# Altium PCB ACS.PcbDoc
Units mil, origin at the board's own origin, x right, y up, seen from the top; angles counter-clockwise.
Board outline 3550 x 3775 mil, 2 copper layers (Top, Bottom), stack 61.811 mil thick; 77 components, 60 nets, 415 pads, 71 vias.
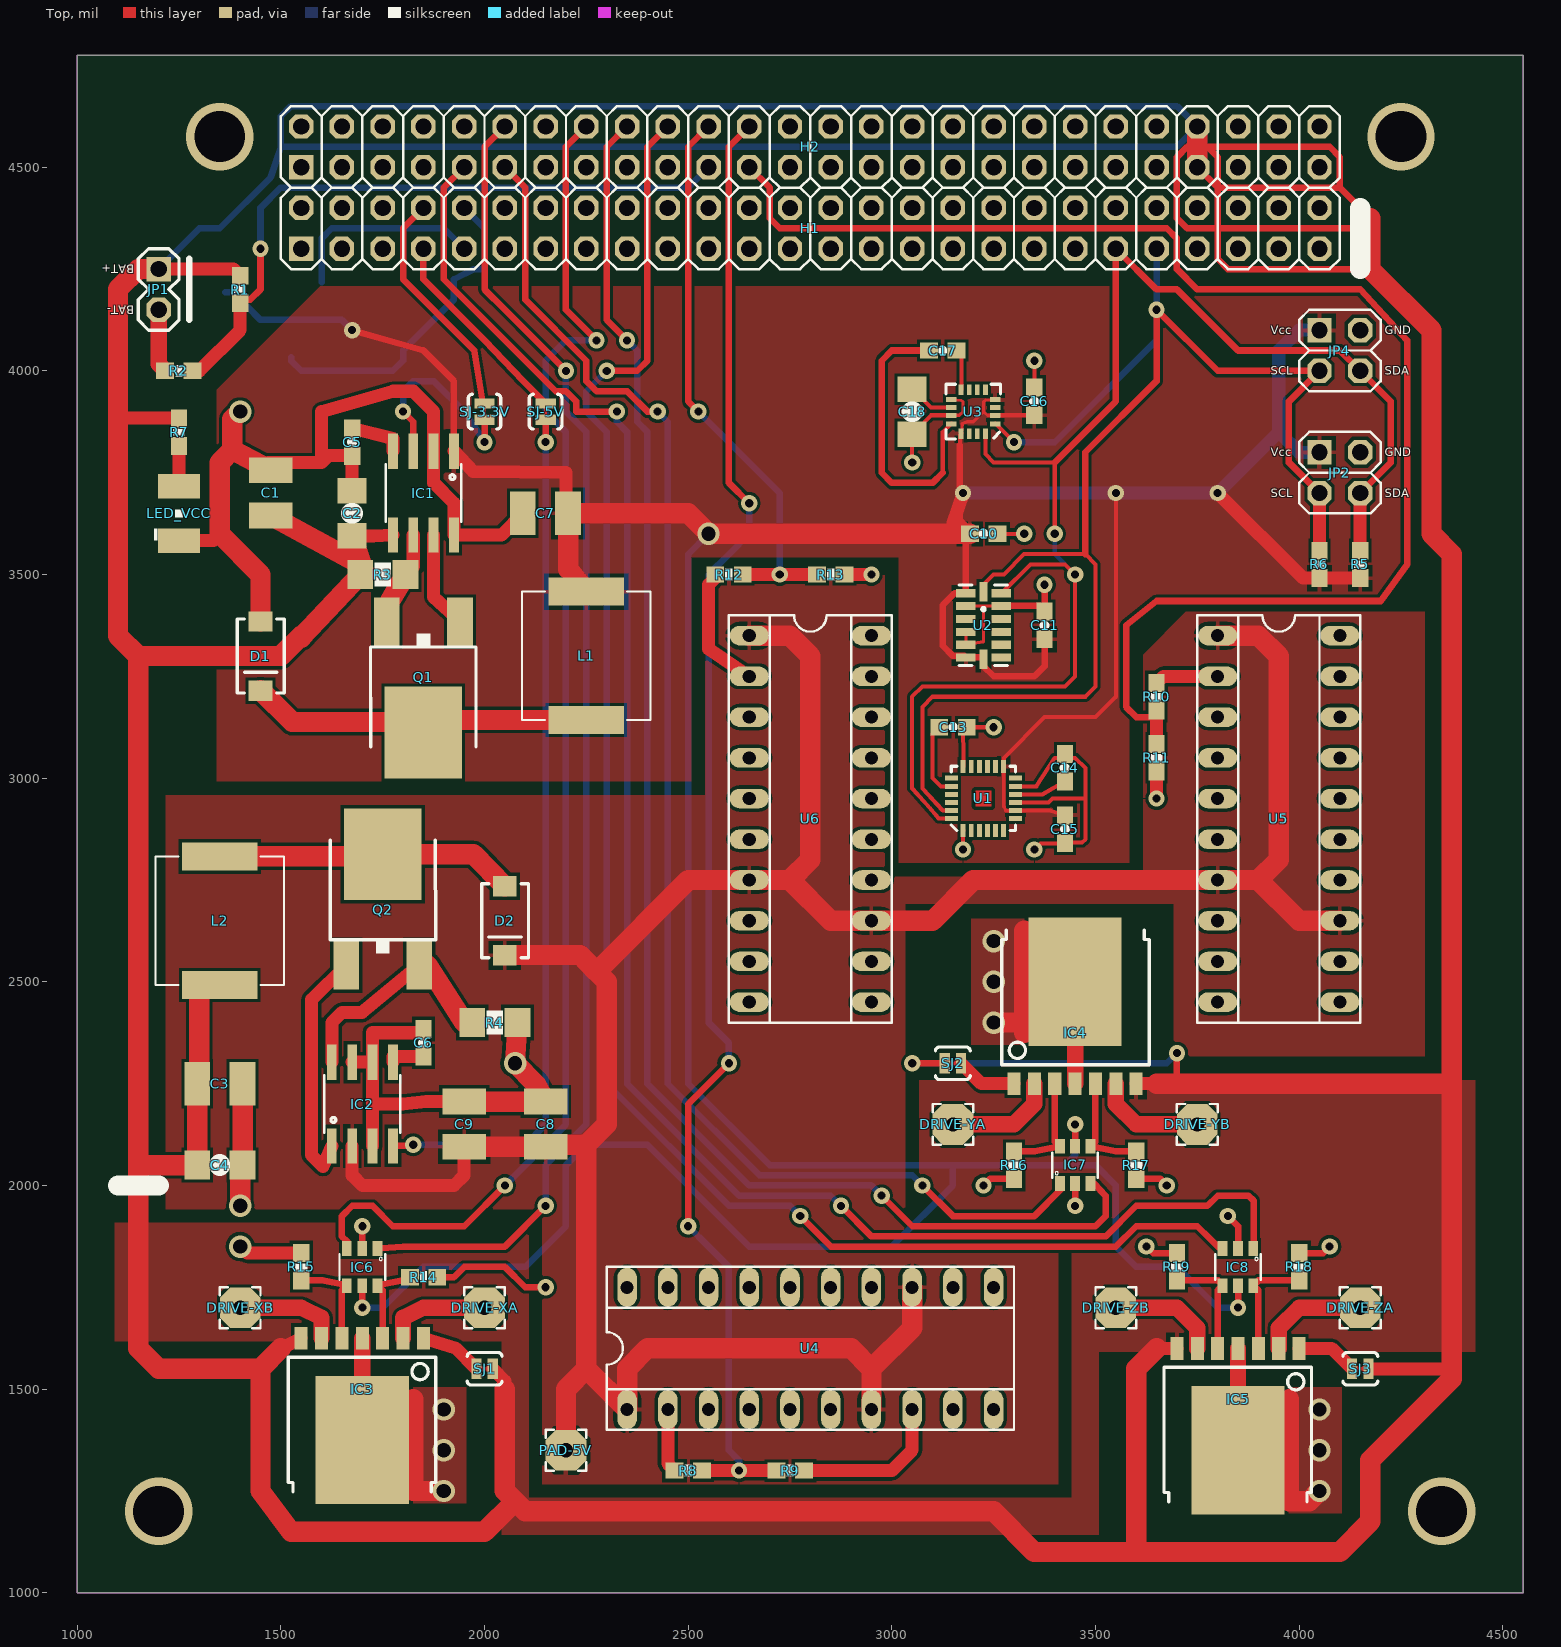
[diagram p0: Top view]
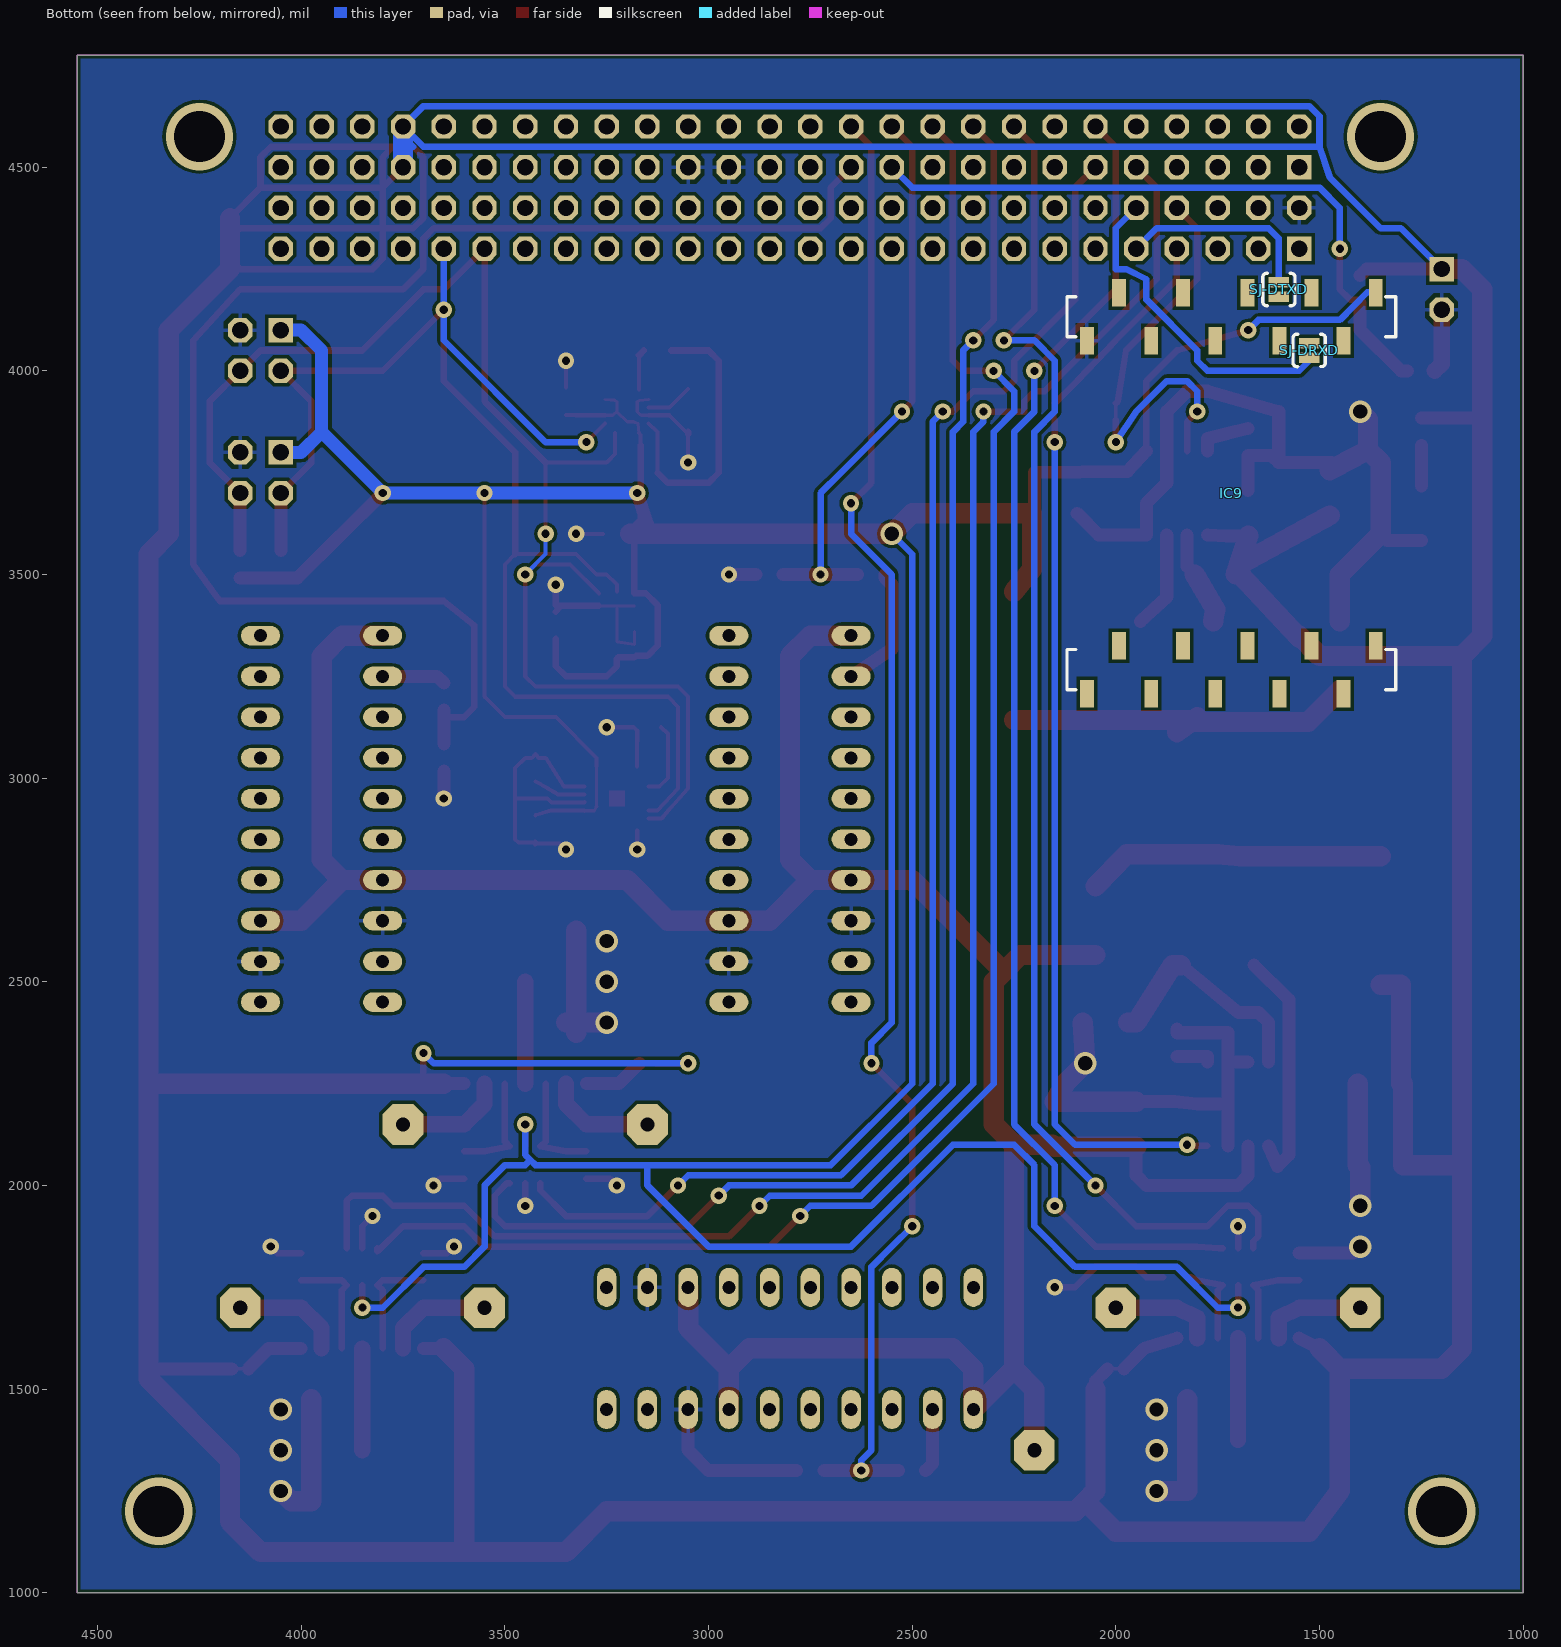
[diagram p1: Bottom view, seen from below]

## Layer stack, top to bottom
Top Solder: solder mask 0.4, Solder Resist, Dk 3.5
Top: signal copper 1.378
Dielectric 1: core 59.0551, FR-4, Dk 4.8
Bottom: signal copper 1.378
Bottom Solder: solder mask 0.4, Solder Resist, Dk 3.5

## Board outline
1000,1000 4550,1000 4550,4775 1000,4775

## Design rules (kind name [scope] priority, off if disabled: settings)
Clearance mdViaVia [IsVia vs IsVia] p1: gap=8
Clearance mdPadVia [IsPad vs IsVia] p2: gap=8
Clearance mdPadPad [IsPad vs IsPad] p3: gap=8
Clearance mdWireVia [(InLayerClass('Signal Layers') AND IsTrack) vs IsVia] p4: gap=8
Clearance mdWirePad [(InLayerClass('Signal Layers') AND IsTrack) vs IsPad] p5: gap=8
Clearance mdWireWire [(InLayerClass('Signal Layers') AND IsTrack) vs (InLayerClass('Signal Layers') AND IsTrack)] p6: gap=8
Clearance [All] p7: gap=8
HoleSize [All] p1: absolutevalues=TRUE maxlimit=100000 minlimit=20 maxpercent=80.000 minpercent=20.000
HoleToHoleClearance [All] p1: gap=8 allowstackedmicrovias=TRUE
PolygonConnect ThermalVias [IsVia] p1: connectstyle=Direct reliefconductorwidth=10 reliefentries=4 polygonreliefangle="90 Angle" airgapwidth=10
PolygonConnect [All] p2: connectstyle=Relief reliefconductorwidth=10 reliefentries=4 polygonreliefangle="90 Angle" airgapwidth=10
RoutingVias [All] p1: holewidth=28 width=50 viastyle="Through Hole" minholewidth=28 minwidth=50 maxholewidth=28 maxwidth=50
SilkToSilkClearance [All] p1 off: silktosilkclearance=10
SilkToSolderMaskClearance [IsPad] p1 off: minsilkscreentomaskgap=10 clearancetoexposedcopper=TRUE
SolderMaskExpansion [All] p1: expansion=0
Width [All] p1: maxlimit=100000 minlimit=8 preferedwidth=10
25 further rules are at their usual default settings.

## Components (designator, comment, footprint, x,y, rotation, side; value= is the part's Value field where it differs from the comment)
C1 "100uF" 1210 1475,3700 r90 top
C2 "1uF" 1206-CAP 1675,3650 r90 top
C3 "100uF" 1210 1350,2250 r0 top
C4 "1uF" 1206-CAP 1350,2050 r0 top
C5 "0.1uF" 0603-CAP 1675,3825 r270 top
C6 "0.1uF" 0603-CAP 1850,2350 r90 top
C7 "100uF" 1210 2150,3650 r180 top
C8 "100uF" 1210 2150,2150 r90 top
C9 "100uF" 1210 1950,2150 r90 top
C10 "0.1uF" 0603-CAP 3225,3600 r0 top
C11 "0.1uF" 0603-CAP 3375,3375 r90 top
C13 "2.2nF" 0603-CAP 3150,3125 r0 top
C14 "0.1uF" 0603-CAP 3425,3025 r90 top
C15 "10nF" 0603-CAP 3425,2875 r270 top
C16 "0.1uF" 0603-CAP 3350,3925 r90 top
C17 "0.22uF" 0603-CAP 3125,4050 r180 top
C18 "4.7uF" 1206-CAP 3050,3900 r270 top
D1 "DIODE-SCHOTTKY-SMA" SMA-DIODE 1450,3300 r270 top
D2 "DIODE-SCHOTTKY-SMA" SMA-DIODE 2050,2650 r270 top
DRIVE-XA "" PAD-22G 2000,1700 r270 top
DRIVE-XB "" PAD-22G 1400,1700 r90 top
DRIVE-YA "" PAD-22G 3150,2150 r90 top
DRIVE-YB "" PAD-22G 3750,2150 r270 top
DRIVE-ZA "" PAD-22G 4150,1700 r270 top
DRIVE-ZB "" PAD-22G 3550,1700 r90 top
H1 "PINHD-2X26" HEADER-2X26 2750,4350 r0 top
H2 "PINHD-2X26" HEADER-2X26 2750,4550 r0 top
IC1 "MAX1626ESA" SO08 1850,3700 r180 top
IC2 "MAX608ESA" SO08 1700,2200 r0 top
IC3 "BD6212HFP" HRP7 1700,1425 r180 top
IC4 "BD6212HFP" HRP7 3450,2450 r0 top
IC5 "BD6212HFP" HRP7 3850,1400 r180 top
IC6 "SN74LVC1G18-SOT23" SOT23-6 1700,1800 r180 top
IC7 "SN74LVC1G18-SOT23" SOT23-6 3450,2050 r0 top
IC8 "SN74LVC1G18-SOT23" SOT23-6 3850,1800 r180 top
IC9 "XBEESMD" XBEE-SMD 2150,3700 r270 bottom
JP1 "PINHD-1X2-BATT" HEADER-1X2-BATT 1200,4250 r270 top
JP2 "PINHD-2X2-I2C" HEADER-2X2-I2C 4100,3750 r270 top
JP4 "PINHD-2X2-I2C" HEADER-2X2-I2C 4100,4050 r270 top
L1 "22uH" 8MM 2250,3300 r90 top
L2 "22uH" 8MM 1350,2650 r90 top
LED_VCC "" PLCC2 1250,3650 r0 top
PAD-5V "" PAD-22G 2200,1350 r180 top
Q1 "STD30PF03LT4" DPAK 1850,3175 r180 top
Q2 "STD95N2LH5" DPAK 1750,2750 r0 top
R1 "10k" 0603-RES 1400,4200 r270 top
R2 "20k" 0603-RES 1250,4000 r180 top
R3 "0.1" 1206-RES 1750,3500 r0 top
R4 "0.1" 1206-RES 2025,2400 r0 top
R5 "4.7K" 0603-RES 4150,3525 r270 top
R6 "4.7K" 0603-RES 4050,3525 r270 top
R7 "4.7k" 0603-RES 1250,3850 r270 top
R8 "10k" 0603-RES 2500,1300 r0 top
R9 "20k" 0603-RES 2750,1300 r0 top
R10 "10k" 0603-RES 3650,3200 r270 top
R11 "20k" 0603-RES 3650,3050 r270 top
R12 "10k" 0603-RES 2600,3500 r0 top
R13 "20k" 0603-RES 2850,3500 r0 top
R14 "4.7k" 0603-RES 1850,1775 r0 top
R15 "4.7k" 0603-RES 1550,1800 r90 top
R16 "4.7k" 0603-RES 3300,2050 r270 top
R17 "4.7k" 0603-RES 3600,2050 r270 top
R18 "4.7k" 0603-RES 4000,1800 r90 top
R19 "4.7k" 0603-RES 3700,1800 r90 top
SJ1 "SOLDERJUMPERTRACE" SJ_2S-TRACE 2000,1550 r0 top
SJ2 "SOLDERJUMPERTRACE" SJ_2S-TRACE 3150,2300 r180 top
SJ3 "SOLDERJUMPERTRACE" SJ_2S-TRACE 4150,1550 r0 top
SJ-3.3V "SOLDERJUMPERTRACE" SJ_2S-TRACE 2000,3900 r270 top
SJ-5V "SOLDERJUMPERTRACE" SJ_2S-TRACE 2150,3900 r270 top
SJ-DRXD "SOLDERJUMPERNO" SJ_2S-NO 1525,4050 r90 bottom
SJ-DTXD "SOLDERJUMPERNO" SJ_2S-NO 1600,4200 r270 bottom
U1 "ITG-3200" QFN-24 3225,2950 r90 top
U2 "ADXL345" LGA14 3225,3375 r90 top
U3 "HMC5883LSMD" 16LPCC 3200,3900 r180 top
U4 "ADXRS614-EVAL" SOCKET-20 2800,1600 r0 top
U5 "ADXRS614-EVAL" SOCKET-20 3950,2900 r270 top
U6 "ADXRS614-EVAL" SOCKET-20 2800,2900 r270 top

## Footprints (in the part's own frame and the unit in brackets; to place one, negate y for a bottom-side part, rotate by r counter-clockwise, add the part's x,y. Pads: shape width x height; smd on the part's side, far side on the other; paste and mask are expansions set on the pad)
8MM [mil] "8MM"
  rect 69x186 smd: P$1(-157.48,0) P$2(158,0)
  silkscreen extent -157,-157 158,158
16LPCC [mil] "16LPCC"
  rect 26x12 smd: 1(-53.94,30) 2(-53.94,10) 3(-53.94,-9.84) 4(-53.94,-29.53) 9(54,-29.53) 10(54,-9.84) 11(54,10) 12(54,30)
  rect 12x26 smd: 5(-29.53,-53.94) 6(-9.84,-53.94) 7(10,-53.94) 8(30,-53.94) 13(30,54) 14(10,54) 15(-9.84,54) 16(-29.53,54)
  silkscreen extent -67,-67 67,67
0603-CAP [mil] "0603-CAP"
  rect 44x40 smd: 1(-33.46,0) 2(34,0)
  silkscreen extent 0,-1 0,2
0603-RES [mil] "0603-RES"
  rect 44x40 smd: 1(-33.46,0) 2(34,0)
  silkscreen extent -9,-15 9,15
1206-CAP [mil] "1206-CAP"
  rect 63x71 smd: 1(-55.12,0) 2(56,0)
  silkscreen extent 0,-1 0,2
1206-RES [mil] "1206-RES"
  rect 63x71 smd: 1(-55.12,0) 2(56,0)
  silkscreen extent -20,-29 20,29
1210 [mil] "1210"
  rect 63x107 smd: 1(-55.12,0) 2(56,0)
DPAK [mil] "DPAK"
  rect 63x119 smd: 1(-89.76,-209.06) 3(90,-209.06)
  rect 190x225 smd: 4(0,63)
  silkscreen extent -129,-181 130,98
HEADER-1X2-BATT [mil] "HEADER-1X2-BATT"
  rect 60x60 hole 40: 1(0,0)
  oct 60x60 hole 40: 2(100,0)
  silkscreen extent -50,-50 150,75
HEADER-2X2-I2C [mil] "HEADER-2X2-I2C"
  rect 60x60 hole 40: 1(-50,-50)
  oct 60x60 hole 40: 2(-50,50) 3(50,-50) 4(50,50)
  silkscreen extent -100,-100 100,100
HEADER-2X26 [mil] "HEADER-2X26"
  rect 60x60 hole 40: 1(-1200,-50)
  oct 60x60 hole 40: 2(-1200,50) 3(-1100,-50) 4(-1100,50) 5(-1000,-50) 6(-1000,50) 7(-900,-50) 8(-900,50) 9(-800,-50) 10(-800,50) 11(-700,-50) 12(-700,50) 13(-600,-50) 14(-600,50) 15(-500,-50) 16(-500,50) 17(-400,-50) 18(-400,50) 19(-300,-50) 20(-300,50) 21(-200,-50) 22(-200,50) 23(-100,-50) 24(-100,50) 25(0,-50) 26(0,50) 27(100,-50) 28(100,50) 29(200,-50) 30(200,50) 31(300,-50) 32(300,50) 33(400,-50) 34(400,50) 35(500,-50) 36(500,50) 37(600,-50) 38(600,50) 39(700,-50) 40(700,50) 41(800,-50) 42(800,50) 43(900,-50) 44(900,50) 45(1000,-50) 46(1000,50) 47(1100,-50) 48(1100,50) 49(1200,-50) 50(1200,50) 51(1300,-50) 52(1300,50)
  silkscreen extent -1250,-100 1350,100
HRP7 [mil] "HRP7"
  rect 32x56 smd: 1(-150,-200) 2(-100,-200) 3(-50,-200) 4(0,-200) 5(50,-200) 6(100,-200) 7(150,-200)
  rect 229x315 smd: P(0,50)
  silkscreen extent -180,-154 182,177
LGA14 [mil] "LGA14"
  rect 20x48 smd: 1(79,44) 2(48,44) 3(16,44) 4(-15.75,44) 5(-47.24,44) 6(-78.74,44) 8(-78.74,-43.31) 9(-47.24,-43.31) 10(-15.75,-43.31) 11(16,-43.31) 12(48,-43.31) 13(79,-43.31)
  rect 48x20 smd: 7(-82.68,0) 14(83,0)
  silkscreen extent -98,-59 99,60
PAD-22G [mil] "PAD-22G"
  oct 100x100 hole 35: 1(0,0)
  silkscreen extent -50,-50 50,50
PLCC2 [mil] "PLCC2"
  rect 103x60 smd: A(0,67) C(0,-66.93)
  silkscreen extent -62,-67 10,10
QFN-24 [mil] "QFN-24"
  rect 32x12 smd: 1(-78.74,50) 2(-78.74,30) 3(-78.74,10) 4(-78.74,-9.84) 5(-78.74,-29.53) 6(-78.74,-49.21) 13(79,-49.21) 14(79,-29.53) 15(79,-9.84) 16(79,10) 17(79,30) 18(79,50)
  rect 12x32 smd: 7(-49.21,-78.74) 8(-29.53,-78.74) 9(-9.84,-78.74) 10(10,-78.74) 11(30,-78.74) 12(50,-78.74) 19(50,79) 20(30,79) 21(10,79) 22(-9.84,79) 23(-29.53,79) 24(-49.21,79)
  Top region: -19.68,-19.68 20,-19.68 20,20 -19.68,20
  silkscreen extent -79,-79 79,79
SJ_2S-NO [mil] "SJ_2S-NO"
  rect 25x50 smd: 1(-17.72,0) 2(18,0)
  silkscreen extent -40,-39 40,40
SJ_2S-TRACE [mil] "SJ_2S-TRACE"
  rect 25x50 smd: 1(-20,0) 2(20,0)
  Top lines w8: -15,0 15,0
  silkscreen extent -42,-40 43,40
SMA-DIODE [mil] "SMA-DIODE"
  rect 50x58 smd: A(-84.65,0) C(85,0)
  silkscreen extent -91,-57 91,58
SO08 [mil] "SO08"
  rect 24x87 smd: 1(-75,-103) 2(-25,-103) 3(25,-103) 4(75,-103) 5(75,103) 6(25,103) 7(-25,103) 8(-75,103)
  silkscreen extent -93,-71 93,71
SOCKET-20 [mil] "SOCKET-20"
  oval 48x96 hole 32: 1(-450,-150) 2(-350,-150) 3(-250,-150) 4(-150,-150) 5(-50,-150) 6(50,-150) 7(150,-150) 8(250,-150) 9(350,-150) 10(450,-150) 11(450,150) 12(350,150) 13(250,150) 14(150,150) 15(50,150) 16(-50,150) 17(-150,150) 18(-250,150) 19(-350,150) 20(-450,150)
  silkscreen extent -500,-200 500,200
SOT23-6 [mil] "SOT23-6"
  rect 24x36 smd: 1(-37.4,-45.28) 2(0,-45.28) 3(38,-45.28) 4(38,46) 5(0,46) 6(-37.4,46)
  silkscreen extent -56,-31 56,31
XBEE-SMD [mil] "XBEE-SMD"
  rect 67x34 smd: 1(-492.13,788) 2(-374.02,709) 3(-492.13,630) 4(-374.02,552) 5(-492.13,473) 6(-374.02,394) 7(-492.13,315) 8(-374.02,237) 9(-492.13,158) 10(-374.02,79) 11(493,79) 12(375,158) 13(493,237) 14(375,315) 15(493,394) 16(375,473) 17(493,552) 18(375,630) 19(493,709) 20(375,788)
  silkscreen extent -482,30 483,837

## Part data
C1 C3 C7 C8 C9: library part 1210
C2 C4 C18: library part 1206-CAP
C5 C6 C10 C11 C13 C14 C15 C16 C17: library part 0603-CAP
D1 D2: library part SMA-DIODE
DRIVE-XA DRIVE-XB DRIVE-YA DRIVE-YB DRIVE-ZA DRIVE-ZB PAD-5V: library part PAD-22G
H1 H2: library part HEADER-2X26
IC1 IC2: library part SO08
IC3 IC4 IC5: library part HRP7
IC6 IC7 IC8: library part SOT23-6
IC9: library part XBEE-SMD
JP1: library part HEADER-1X2-BATT
JP2 JP4: library part HEADER-2X2-I2C
L1 L2: library part 8MM
LED_VCC: library part PLCC2
Q1 Q2: library part DPAK
R1 R2 R5 R6 R7 R8 R9 R10 R11 R12 R13 R14 R15 R16 R17 R18 R19: library part 0603-RES
R3 R4: library part 1206-RES
SJ1 SJ2 SJ3 SJ-3.3V SJ-5V: library part SJ_2S-TRACE
SJ-DRXD SJ-DTXD: library part SJ_2S-NO
U1: library part QFN-24
U2: library part LGA14
U3: library part 16LPCC
U4 U5 U6: library part SOCKET-20

## Via types
v1: diameter 40/40 (per signal layer), hole 20, Top to Bottom, 53 vias
v2: diameter 55/55 (per signal layer), hole 35, Top to Bottom, 14 vias
v3: diameter 165/165 (per signal layer), hole 125, Top to Bottom, 4 vias

## Nets (pads, with @x,y where several pads share a name; then routed paths per layer and width w, separated by ;. In a path a pad name is that pad's centre, name@x,y a point inside that pad or via, vN(x,y) a via of type N, cw(c..) or ccw(c..) an arc to the next point about the centre after c; other vN are vias at no path point)
3.3V: C7.1 C10.1 C11.1 C15.1 C16.1 IC1.1 IC6.5 IC7.5 IC8.5 IC9.1 JP2.1 JP4.1 L1.P$2 R5.2 R6.2 U1.8 U1.13 U2.1 U2.6 U2.7 U3.2 U3.4 U3.13 | length 11799.1
  Top w8: U3.13@3171,3847 3173,3871 3185,3875 3200,3875 3225,3900 ; U3.2@3254,3891 3235,3891 3225,3900 ; U3.4@3254,3930 3230,3928 3225,3924 3225,3900 ; 3275,2930 3280,2920 U1.8@3304,2920 ; 3275,2931 U1.13@3275,3029
  Top w10: 3167,3817 3167,3843 U3.13@3171,3847 ; U3.2@3254,3891 3327,3891 C16.1@3350,3892 ; 3275,2930 3275,2931 ; U1.13@3275,3029 3275,3050 3375,3150 3500,3150 3550,3200 v1(3550,3700) ; U1.8@3304,2920 3304,2921 3388,2921 C15.1@3425,2909
  Top w16: v1(1675,4100) 1850,4050 1925,3975 IC1.1 ; v1(1700,1700) IC6.5@1700,1755 ; 3167,3817 3167,3634 3192,3609 3192,3600 3182,3591 3182,3454 3154,3454 3125,3425 3125,3325 3150,3300 3178,3300 3182,3297 3222,3297 3225,3293 3225,3275 3250,3250 3350,3250 3375,3275 C11.1@3375,3342 ; IC7.5 v1(3450,2150) ; v1(3850,1700) IC8.5@3850,1755
  Top w32: IC1.1 1972,3753 2200,3750 2200,3656 C7.1@2206,3650 ; 3150,3600 3150,3625 v1(3175,3700) ; v1(3800,3700) 4009,3492 4050,3492 R5.2@4150,3492
  Top w50: L1.P$2 2206,3513 2206,3650 2500,3650 v2(2550,3600) 3150,3600 C10.1@3192,3600
  Bottom w16: IC9.1@1363,4193 1383,4193 1450,4125 1650,4125 v1(1675,4100) ; v1(1700,1700) 1750,1700 1850,1800 2100,1800 2200,1900 2200,2050 2250,2100 2400,2100 2650,1850 3000,1850 3150,2000 3150,2050 ; v2(2550,3600) 2500,3550 2500,2250 2700,2050 3150,2050 ; v1(3450,2150) 3450,2075 3438,2063 ; v1(3850,1700) 3800,1700 3700,1800 3600,1800 3550,1850 3550,2000 3500,2050 3450,2050 3438,2063 ; 3150,2050 3425,2050 3438,2063
  Bottom w32: v1(3175,3700) v1(3550,3700) v1(3800,3700) 3950,3850 ; JP2.1 4000,3800 3950,3850 ; JP4.1 4000,4100 3950,4050 3950,3850
5V: C8.1 C9.1 D2.C IC2.2 PAD-5V.1 U4.1 U4.7 U4.13 U5.1 U5.7 U5.13 U6.1 U6.7 U6.13 | length 7058.1
  Top w32: IC2.2 1675,2025 1700,2000 1925,2000 1950,2025 C9.1@1950,2095
  Top w50: C9.1@1950,2095 2150,2095 2156,2100 2250,2100 ; D2.C@2050,2566 2235,2566 2275,2525 ; PAD-5V.1 2200,1500 2250,1550 ; U6.1 2750,3350 2800,3300 2800,2800 2750,2750 ; U4.13 3050,1650 2950,1550 ; U5.1 3900,3350 3950,3300 3950,2800 3900,2750 ; U5.13 4000,2650 3900,2750 ; 2250,1550 U4.1 2350,1550 2400,1600 2900,1600 2950,1550 ; 2250,1550 2250,2100 ; 2250,2100 2300,2150 2300,2500 2275,2525 ; 2275,2525 2500,2750 U6.7 2750,2750 ; 2750,2750 2850,2650 U6.13 3100,2650 3200,2750 U5.7 3900,2750 ; 2950,1550 U4.7 2950,1550
+4.1V: C1.1 C2.1 C3.1 C4.1 H2.45 H2.46 IC1.5 IC3.7 IC4.7 IC5.7 JP1.1 L2.P$1 R1.1 R3.1 R7.1 SJ1.2 SJ2.2 SJ3.2 | length 22262.7
  Top w16: v1(3050,2300) SJ2.2 ; 3700,2250 v1(3700,2325) ; 3725,4550 3700,4525 3700,4375 3725,4350 4150,4350 4175,4325 4175,4275 4150,4250 3825,4250 3800,4275 3800,4525 3775,4550 ; H2.45 3800,4450 4100,4450 ; 3750,4550 3775,4550 ; 4175,4375 4100,4450 ; 3775,4550 4075,4550 4100,4525 4100,4450
  Top w32: 1100,3900 1117,3884 R7.1@1250,3884 ; JP1.1 1384,4250 R1.1@1400,4234 ; 1500,1600 IC3.7 ; C2.1@1675,3595 1728,3595 IC1.5 ; SJ1.2 2050,1520 2050,1500 ; IC4.7 3650,2250 ; 3650,1600 IC5.7 ; SJ3.2 4375,1550
  Top w50: JP1.1 1150,4250 1100,4200 1100,3900 1100,3350 1150,3300 ; L2.P$1@1350,2493 1300,2493 1300,2250 1295,2250 1295,2050 1150,2050 ; C1.1@1475,3645 R3.1@1695,3525 ; 1500,1600 1450,1550 ; C2.1@1675,3595 1706,3500 R3.1@1695,3525 ; 2050,1500 2050,1250 2075,1225 ; 3650,1600 3600,1550 3600,1100 ; 3650,2250 3700,2250 4375,2250 ; H2.45 H2.46 ; 4175,4375 4175,4250 4325,4100 4325,3600 4375,3550 4375,2250 ; 1150,2050 1150,3300 ; 1150,2050 1150,1600 1200,1550 1450,1550 ; 1150,3300 1500,3300 1550,3350 1550,3345 1695,3500 R3.1@1695,3525 ; 1450,1550 1450,1250 1525,1150 2000,1150 2075,1225 ; 2075,1225 2100,1200 3250,1200 3350,1100 3600,1100 ; 3600,1100 4100,1100 4175,1175 4175,1325 4375,1525 4375,1550 4375,2250
  Bottom w16: JP1.1 1300,4350 1350,4350 1475,4475 1500,4550 ; v1(3050,2300) 3675,2300 v1(3700,2325) ; 3725,4550 3750,4575 H2.46 ; 1500,4550 3700,4550 H2.46 ; 1500,4550 1500,4625 1525,4650 3700,4650 H2.46
  Bottom w50: H2.45 H2.46
DIR-X: H2.12 IC6.1 | length 3269.3
  Top w16: IC6.1@1738,1846 1746,1846 1800,1850 2050,1850 v1(2150,1950) ; H2.12 2000,4550 2000,4200 2050,4150 2125,4075 v1(2200,4000)
  Bottom w16: v1(2150,1950) 2150,2050 2250,2150 2250,3850 2200,3900 v1(2200,4000)
DIR-Y: H2.11 IC7.1 | length 3615
  Top w16: H2.11 2100,4450 2100,4175 2250,4025 2250,3975 2275,3950 2350,3950 2400,3900 v1(2425,3900) ; v1(3075,2000) 3150,1925 3350,1925 3413,1988 IC7.1@3413,2005
  Bottom w16: v1(2425,3900) 2450,3875 2450,2250 2675,2025 3050,2025 v1(3075,2000)
DIR-Z: H2.9 IC8.1 | length 4386.8
  Top w16: H2.9 1900,4450 1900,4225 2025,4100 2100,4025 2175,3950 2200,3950 2225,3925 2225,3900 v1(2325,3900) ; v1(2875,1950) 2950,1875 3525,1875 3600,1950 3775,1950 3800,1975 3875,1975 3888,1963 IC8.1@3888,1846
  Bottom w16: v1(2325,3900) 2325,3875 2350,3850 2350,2250 2625,1975 2850,1975 v1(2875,1950)
DRX: IC9.2 SJ-DRXD.2
DTX: IC9.3 SJ-DTXD.2
GND: C1.2 C2.2 C3.2 C4.2 C5.2 C6.2 C7.2 C8.2 C9.2 C10.2 C11.2 C13.2 C14.2 C15.2 C16.2 C18.2 D1.A H1.2 H2.29 H2.31 IC1.2 IC1.8 IC2.3 IC2.6 IC2.7 IC3.4 IC3.P IC4.4 IC4.P IC5.4 IC5.P IC6.2 IC7.2 IC8.2 IC9.10 JP1.2 JP2.2 JP4.2 LED_VCC.C R2.2 R4.2 R9.2 R11.2 R13.2 R14.2 R15.2 R16.2 R17.2 R18.2 R19.2 U1.1 U1.9 U1.11 U1.18 U2.2 U2.4 U2.5 U2.12 U3.9 U3.11 U4.8 U4.12 U5.8 U5.12 U6.8 U6.12 | length 8635.3
  Top w8: U3.11@3147,3891 3166,3891 3175,3900 3175,3924 3171,3927 U3.9@3147,3930 ; U2.4@3182,3360 3182,3328 3225,3335 3225,3423 ; U2.2@3182,3423 3225,3423 ; U2.12@3269,3423 3225,3423
  Top w10: v1(3050,3775) 3050,3845 3096,3891 U3.11@3147,3891 ; v1(3175,2825) 3175,2871 U1.1@3176,2872 ; 3176,3051 3176,3029 3176,3076 3175,3100 3175,3117 C13.2 v1(3250,3125) ; C10.2 v1(3325,3600) ; U1.9@3304,2941 3304,2940 3385,2940 3395,2950 3475,2950 ; U1.11@3304,2980 3355,2980 3400,3050 3417,3050 C14.2 3434,3050 3450,3050 3475,3025 3475,2950 ; v1(3350,2825) 3365,2840 C15.2@3425,2840 ; C16.2 v1(3350,4025) ; C15.2@3425,2842 3467,2842 3475,2850 3475,2950
  Top w16: IC6.2@1700,1846 v1(1700,1900) ; R14.2 1925,1775 1950,1800 2050,1800 2100,1750 v1(2150,1750) ; C18.2@3050,3845 C18.2@3050,3850 ; v1(3225,2000) 3242,2017 R16.2@3300,2017 ; U2.12@3269,3423 C11.2@3362,3423 ; C11.2 C11.2@3362,3423 ; v1(3375,3475) 3375,3425 3373,3423 C11.2@3362,3423 ; C15.2@3425,2840 C15.2@3425,2842 ; v1(3450,1950) IC7.2@3450,2005 ; R17.2@3600,2017 3659,2017 v1(3675,2000) ; v1(3625,1850) 3642,1834 R19.2 ; v1(3825,1925) 3850,1900 IC8.2@3850,1846 ; R18.2 4059,1834 v1(4075,1850)
  Top w32: LED_VCC.C@1250,3584 1334,3584 1350,3600 ; v2(1400,1850) 1417,1834 R15.2 ; C1.2@1458,3765 1469,3775 1600,3775 ; IC2.7 IC2.6 ; C2.2 1675,3792 1617,3792 1600,3775 ; IC2.3 1725,2200 ; C6.2 1850,2375 1725,2375 IC2.6 ; C9.2 1856,2206 1800,2200 1725,2200 ; C7.2@2095,3650 2042,3597 IC1.8 1925,3675 1875,3725 IC1.2 1875,3900 1825,3950 1775,3950 1600,3900 1600,3775 ; R9.2 3000,1300 3050,1350 U4.8 ; R13.2 v1(2950,3500) ; v1(3650,2950) R11.2@3650,3017 ; 1725,2200 IC2.6
  Top w40: JP1.2 1200,4017 R2.2@1217,4000 ; IC3.P IC3.4 ; IC4.4 IC4.P ; IC5.P IC5.4
  Top w50: v2(1400,1950) 1400,2045 C4.2 C3.2 ; v2(1400,3900) 1381,3881 1381,3806 ; D1.A@1450,3385 1450,3500 1350,3600 1350,3775 1381,3806 ; C1.2 1381,3806 ; 1825,1475 1825,1250 v2(1900,1250) ; C9.2 C8.2 2125,2250 v2(2075,2300) R4.2 ; v2(3250,2400) 3325,2400 ; 3325,2375 3325,2400 ; 3325,2625 3325,2400 ; IC4.P@3350,2400 3325,2400 ; 3975,1475 3975,1225 4025,1225 v2(4050,1250)
  other v2: 1900,1350 4050,1350 1900,1450 4050,1450 3250,2500 3250,2600
N$1: C13.1 U1.20 | length 187.3
  Top w10: C13.1@3117,3125 3100,3109 3100,3000 3121,2980 U1.20@3147,2980
N$2: C5.1 IC1.4 | length 134.1
  Top w32: C5.1@1675,3859 1775,3834 IC1.4
N$3: C6.1 IC2.5 | length 89
  Top w32: IC2.5 1775,2317 C6.1@1850,2317
N$4: IC1.7 Q1.1 | length 240.5
  Top w32: IC1.7 1875,3445 Q1.1@1940,3385
N$5: IC2.1 Q2.1 | length 596.1
  Top w32: IC2.1 1603,2047 1575,2075 1575,2456 Q2.1@1661,2541
N$6: D1.C L1.P$1 Q1.4 | length 964.8
  Top w50: D1.C@1450,3216 1528,3138 1838,3138 1850,3125 1850,3113 1800,3150 1808,3143 L1.P$1@2250,3143
N$7: D2.A L2.P$2 Q2.4 | length 732.8
  Top w50: L2.P$2 1695,2808 Q2.4 1973,2813 D2.A@2050,2735
N$8: IC1.6 Q1.3 R3.2 | length 233.6
  Top w32: R3.2 1825,3520 IC1.6
  Top w50: Q1.3@1761,3385 1756,3415 R3.2
N$9: LED_VCC.A R7.2 | length 100
  Top w32: LED_VCC.A R7.2@1250,3817
N$10: C14.1 U1.10 | length 129.5
  Top w10: U1.10@3304,2960 3369,2960 C14.1@3425,2992
N$11: IC3.1 SJ1.1 | length 154.5
  Top w32: IC3.1 1930,1600 SJ1.1
N$12: IC4.1 SJ2.1 | length 150.7
  Top w32: SJ2.1 3220,2250 IC4.1
N$13: IC2.8 Q2.3 R4.1 | length 571.2
  Top w32: IC2.8 1625,2400 1650,2425 1699,2425 Q2.3@1840,2541
  Top w50: Q2.3@1840,2541 1860,2541 1950,2400 R4.1@1970,2400
N$14: C18.1 U3.10 | length 116.1
  Top w10: C18.1@3050,3956 3096,3910 U3.10@3147,3910
N$15: C17.1 U3.8 | length 101
  Top w10: U3.8@3171,3954 C17.1@3171,4038
  Top w16: C17.1@3159,4050 C17.1@3171,4038
N$16: C17.2 U3.12 | length 703.5
  Top w10: 3125,3750 3125,3850 U3.12@3147,3871
  Top w16: C17.2@3092,4050 3000,4050 2975,4025 2975,3750 3000,3725 3100,3725 3125,3750
N$17: IC5.1 SJ3.1 | length 150.7
  Top w32: IC5.1 4080,1600 SJ3.1
N$18: IC3.3 IC6.6 R14.1 | length 216.9
  Top w16: IC3.3 1750,1743 1738,1755 1800,1767 R14.1@1817,1775
N$19: IC3.5 IC6.4 R15.1 | length 249.8
  Top w16: R15.1@1550,1767 1601,1767 1663,1755 1650,1743 IC3.5
N$20: IC4.3 IC7.6 R16.1 | length 273.8
  Top w16: R16.1@3300,2084 3351,2084 3413,2096 3400,2108 IC4.3
N$21: IC4.5 IC7.4 R17.1 | length 272.1
  Top w16: IC4.5 3500,2108 IC7.4 3550,2084 R17.1@3600,2084
N$22: IC5.3 IC8.6 R18.1 | length 276.9
  Top w16: IC5.3 3900,1743 3888,1755 3900,1767 R18.1@4000,1767
N$23: IC5.5 IC8.4 R19.1 | length 278.7
  Top w16: R19.1@3700,1767 3801,1767 3813,1755 3800,1743 IC5.5
N$24: H1.7 SJ-5V.1 | length 502.8
  Top w16: H1.7 1850,4225 2000,4075 2095,3975 SJ-5V.1
N$25: 
  other v3: 1350,4575
N$26: 
  other v3: 4250,4575
N$27: H1.9 SJ-DTXD.1 | length 488.1
  Bottom w16: SJ-DTXD.1@1600,4218 1600,4325 1625,4350 1900,4350 H1.9
N$28: H1.10 SJ-DRXD.1 | length 807.1
  Bottom w16: SJ-DRXD.1@1525,4033 1525,4025 1550,4000 1775,4000 1800,4025 1800,4050 1925,4175 1925,4225 1975,4250 2000,4250 2000,4350 H1.10
N$30: DRIVE-XA.1 IC3.2 | length 255.9
  Top w40: IC3.2 1800,1675 1850,1700 DRIVE-XA.1
N$31: DRIVE-XB.1 IC3.6 | length 255.9
  Top w40: DRIVE-XB.1 1550,1700 1600,1675 IC3.6
N$32: DRIVE-YA.1 IC4.2 | length 270.7
  Top w40: DRIVE-YA.1 3300,2150 3350,2200 IC4.2
N$33: DRIVE-YB.1 IC4.6 | length 270.7
  Top w40: IC4.6 3550,2200 3600,2150 DRIVE-YB.1
N$34: DRIVE-ZA.1 IC5.2 | length 270.7
  Top w40: IC5.2 3950,1650 4000,1700 DRIVE-ZA.1
N$35: DRIVE-ZB.1 IC5.6 | length 270.7
  Top w40: DRIVE-ZB.1 3700,1700 3750,1650 IC5.6
N$39: 
  other v3: 1200,1200
N$40: 
  other v3: 4350,1200
N$41: H1.8 SJ-3.3V.1 | length 576.9
  Top w16: H1.8 1800,4350 1800,4225 1975,4050 1995,3925 SJ-3.3V.1
PWM-X: H2.16 IC6.3 | length 3387.5
  Top w16: IC6.3@1663,1846 1663,1863 1650,1875 1650,1925 1675,1950 1725,1950 1775,1900 1950,1900 v1(2050,2000) ; H2.16 2200,4550 2200,4150 v1(2275,4075)
  Bottom w16: v1(2050,2000) 2200,2150 2200,3850 2150,3900 2150,4025 2200,4075 v1(2275,4075)
PWM-Y: H2.18 IC7.3 | length 3792.2
  Top w16: v1(2350,4075) 2300,4125 2300,4550 H2.18 ; v1(2975,1975) 3050,1900 3500,1900 3525,1925 3525,1975 3496,2005 IC7.3@3488,2005
  Bottom w16: v1(2350,4075) 2375,4050 2375,3875 2400,3850 2400,2250 2650,2000 2950,2000 v1(2975,1975)
PWM-Z: H2.20 IC8.3 | length 4230.3
  Top w16: v1(2300,4000) 2375,4000 2400,4025 2400,4550 H2.20 ; v1(2775,1925) 2850,1850 3550,1850 3600,1900 3750,1900 3813,1838 IC8.3@3813,1846
  Bottom w16: v1(2300,4000) 2250,3950 2250,3900 2300,3850 2300,2250 2600,1950 2750,1950 v1(2775,1925)
RATE-X: H2.24 R8.2 R9.1 | length 3771.8
  Top w16: v1(2500,1900) 2500,2200 v1(2600,2300) ; v1(2625,1300) R9.1@2717,1300 ; v1(2650,3675) 2600,3725 2600,4250 2600,4550 H2.24
  Top w32: R8.2 v1(2625,1300) R9.1@2717,1300
  Bottom w16: v1(2500,1900) 2550,1850 2600,1800 2600,1350 2625,1325 v1(2625,1300) ; v1(2600,2300) 2600,2350 2550,2400 2550,3500 2600,3550 2650,3600 2650,3650 v1(2650,3675)
RATE-Y: H2.23 R10.2 R11.1 | length 3564.8
  Top w16: H2.23 2700,4450 2700,4375 2725,4350 3675,4350 3700,4325 3700,4250 3750,4200 4150,4200 4265,4075 4265,3525 4200,3435 3650,3435 3575,3375 3575,3200 3575,3175 3600,3150 3634,3150 R10.2@3650,3167
  Top w32: R11.1@3650,3084 R10.2@3650,3167
RATE-Z: H2.22 R12.2 R13.1 | length 1396.9
  Top w16: v1(2525,3900) 2500,3925 2500,4250 2500,4550 H2.22
  Top w32: R12.2 v1(2725,3500) R13.1@2817,3500
  Bottom w16: v1(2525,3900) 2675,3750 2725,3700 2725,3575 v1(2725,3500)
RATEOUT-X: R8.1 U4.2 | length 157
  Top w32: U4.2 2450,1317 R8.1@2467,1300
RATEOUT-Y: R10.1 U5.2 | length 156.3
  Top w32: R10.1@3650,3234 3667,3250 U5.2
RATEOUT-Z: R12.1 U6.2 | length 310.4
  Top w32: R12.1@2567,3500 2567,3492 2550,3475 2550,3317 U6.2
SCL: H1.43 JP2.3 JP4.3 R6.1 U1.23 U2.14 U3.1 | length 4006.1
  Top w10: U1.23@3147,2921 3125,2921 3075,2975 3075,3175 3100,3200 3475,3200 3500,3225 3500,3475 3500,3525 3475,3550 ; U2.14 3225,3475 3250,3500 3275,3500 3325,3550 ; U3.1@3254,3871 v1(3300,3825) ; 3325,3550 3475,3550 ; 3325,3550 3475,3550
  Top w16: 3475,3550 3475,3800 3650,3975 v1(3650,4150) 3800,4000 JP4.3 3975,3925 3975,3775 JP2.3
  Top w32: R6.1@4050,3559 JP2.3
  Bottom w16: v1(3300,3825) 3400,3825 3650,4075 3650,4250 ; v1(3650,4150) 3650,4250 ; H1.43 3650,4250
SDA: H1.41 JP2.4 JP4.4 R5.1 U1.24 U2.13 U3.16 | length 3728.6
  Top w10: U1.24@3147,2901 3115,2901 3095,2925 3050,2975 3050,3200 3075,3225 3425,3225 3450,3250 3450,3425 v1(3450,3500) 3425,3525 3340,3525 U2.13@3269,3454 ; U3.16@3230,3847 3230,3796 3250,3775 3400,3775 v1(3400,3600)
  Top w16: 3400,3775 3550,3925 H1.41 ; JP2.4 4225,3775 4225,3925 JP4.4 4100,4050 3850,4050 3700,4200 3650,4200 ; H1.41 3650,4200 ; H1.41 3650,4200
  Top w32: R5.1@4150,3559 JP2.4
  Bottom w10: v1(3400,3600) 3400,3550 v1(3450,3500)
SHDN_3.3V: IC1.3 SJ-3.3V.2 | length 493.9
  Top w16: v1(1800,3900) 1825,3875 IC1.3 ; v1(2000,3825) SJ-3.3V.2
  Bottom w16: v1(1800,3900) 1800,3950 1825,3975 1875,3975 1950,3900 v1(2000,3825)
SHDN_5V: IC2.4 SJ-5V.2 | length 2127
  Top w16: IC2.4 1822,2097 v1(1825,2100) ; v1(2150,3825) SJ-5V.2
  Bottom w16: v1(1825,2100) 2100,2100 2150,2150 v1(2150,3825)
VBATT: H2.21 R1.2 R2.1 | length 1629.2
  Top w16: R1.2@1400,4167 1409,4175 1425,4175 1450,4200 v1(1450,4300)
  Top w32: R2.1@1284,4000 1300,4000 1400,4100 R1.2@1400,4167
  Bottom w16: v1(1450,4300) 1450,4400 1500,4450 2500,4450 H2.21
pads on no net: H1.1 H1.3 H1.4 H1.5 H1.6 H1.11 H1.12 H1.13 H1.14 H1.15 H1.16 H1.17 H1.18 H1.19 H1.20 H1.21 H1.22 H1.23 H1.24 H1.25 H1.26 H1.27 H1.28 H1.29 H1.30 H1.31 H1.32 H1.33 H1.34 H1.35 H1.36 H1.37 H1.38 H1.39 H1.40 H1.42 H1.44 H1.45 H1.46 H1.47 H1.48 H1.49 H1.50 H1.51 H1.52 H2.1 H2.2 H2.3 H2.4 H2.5 H2.6 H2.7 H2.8 H2.10 H2.13 H2.14 H2.15 H2.17 H2.19 H2.25 H2.26 H2.27 H2.28 H2.30 H2.32 H2.33 H2.34 H2.35 H2.36 H2.37 H2.38 H2.39 H2.40 H2.41 H2.42 H2.43 H2.44 H2.47 H2.48 H2.49 H2.50 H2.51 H2.52 IC9.4 IC9.5 IC9.6 IC9.7 IC9.8 IC9.9 IC9.11 IC9.12 IC9.13 IC9.14 IC9.15 IC9.16 IC9.17 IC9.18 IC9.19 IC9.20 U1.2 U1.3 U1.4 U1.5 U1.6 U1.7 U1.12 U1.14 U1.15 U1.16 U1.17 U1.19 U1.21 U1.22 U2.3 U2.8 U2.9 U2.10 U2.11 U3.3 U3.5 U3.6 U3.7 U3.14 U3.15 U4.3 U4.4 U4.5 U4.6 U4.9 U4.10 U4.11 U4.14 U4.15 U4.16 U4.17 U4.18 U4.19 U4.20 U5.3 U5.4 U5.5 U5.6 U5.9 U5.10 U5.11 U5.14 U5.15 U5.16 U5.17 U5.18 U5.19 U5.20 U6.3 U6.4 U6.5 U6.6 U6.9 U6.10 U6.11 U6.14 U6.15 U6.16 U6.17 U6.18 U6.19 U6.20

## Polygon pours and split planes (outlines as drawn)
GND on Bottom "Bottom-GND" (solid, remove dead copper, pour order 2): 992,992 992,4783 4558,4783 4558,992
5V on Top "Top-5V" (solid, remove dead copper, pour order 14): 1217,2958 2542,2958 2542,3508 2983,3508 2983,2758 3617,2758 3617,3303.31 3721.69,3408 4308,3408 4308,2317 3692,2317 3692,2692 3033,2692 3033,1858 3408,1858 3408,1267 2142,1267 2142,1942 1217,1942
3.3V on Top "Top-3.3V" (solid, remove dead copper, pour order 12): 1342,2992 1342,3953.31 1596.69,4208 4153.31,4208 4283,4078.31 4283,3547.33 4204,3442 3728.31,3442 3583,3296.69 3583,2792 3017,2792 3017,3542 2508,3542 2508,2992
+4.1V on Top "Top-+4.1V" (solid, remove dead copper, pour order 10): 1092,1908 2108,1908 2108,1233 3442,1233 3442,1867 3067,1867 3067,2258 4433,2258 4433,1592 3508,1592 3508,1142 2042,1142 2042,1617 1400,1617 1092,1617
GND on Top "Top-GND 2" (solid, remove dead copper, pour order 8): 3745,1195 4105,1195 4105,1505 3745,1505
GND on Top "Top-GND 1" (solid, remove dead copper, pour order 6): 3555,2655 3195,2655 3195,2345 3555,2345
GND on Top "Top-GND" (solid, remove dead copper, pour order 4): 1595,1505 1955,1505 1955,1220 1595,1220

## Keep-outs
Keep-Out Layer:
  the board outline again, w0

## Silkscreen, mask and mechanical layers (free items; w line width, h text height)
Top Overlay:
  lines w50: 1100,2000 1200,2000 ; 4150,4250 4150,4400
Dimension:
  the board outline again, w0
Milling:
  lines w10: 1000,1650 1000,2488 1065,2488 1065,3288 1000,3288 1000,4315 1220,4535 1220,4775 2420,4775 2420,4660 3220,4660 3220,4775 4370,4775 4370,3675 4550,3675 4550,1000 3220,1000 3220,1115 2420,1115 2420,1000 1705,1000 1705,1115 1355,1115 1355,1000 1035,1000 1035,1650 1000,1650
Unrouted:
  lines w0: 1442,4075 1525,4068 ; 1458,3765 1475,3756 ; 1521,4193 1600,4183

## Text inside footprints (layer, text, board x,y; h text height)
JP1: Top Overlay "BAT-" at 1140,4160 h20.4 r180; Top Overlay "BAT+" at 1140,4260 h20.4 r180
JP2: Top Overlay "SDA" at 4210,3690 h20.4; Top Overlay "SCL" at 3930,3690 h20.4; Top Overlay "Vcc" at 3930,3790 h20.4; Top Overlay "GND" at 4210,3790 h20.4
JP4: Top Overlay "SDA" at 4210,3990 h20.4; Top Overlay "SCL" at 3930,3990 h20.4; Top Overlay "Vcc" at 3930,4090 h20.4; Top Overlay "GND" at 4210,4090 h20.4
U1: tDocu "Z" at 3191,2950 h24.8 r90; tDocu "Y" at 3199,2902 h24.8 r90; tDocu "X" at 3272,2994 h24.8 r90
U2: tDocu "Z" at 3220,3370 h18.6 r90; tDocu "Y" at 3235,3355 h18.6 r90; tDocu "X" at 3235,3370 h18.6 r90